# EAGLE board PCB (EAGLE 9.7.0)
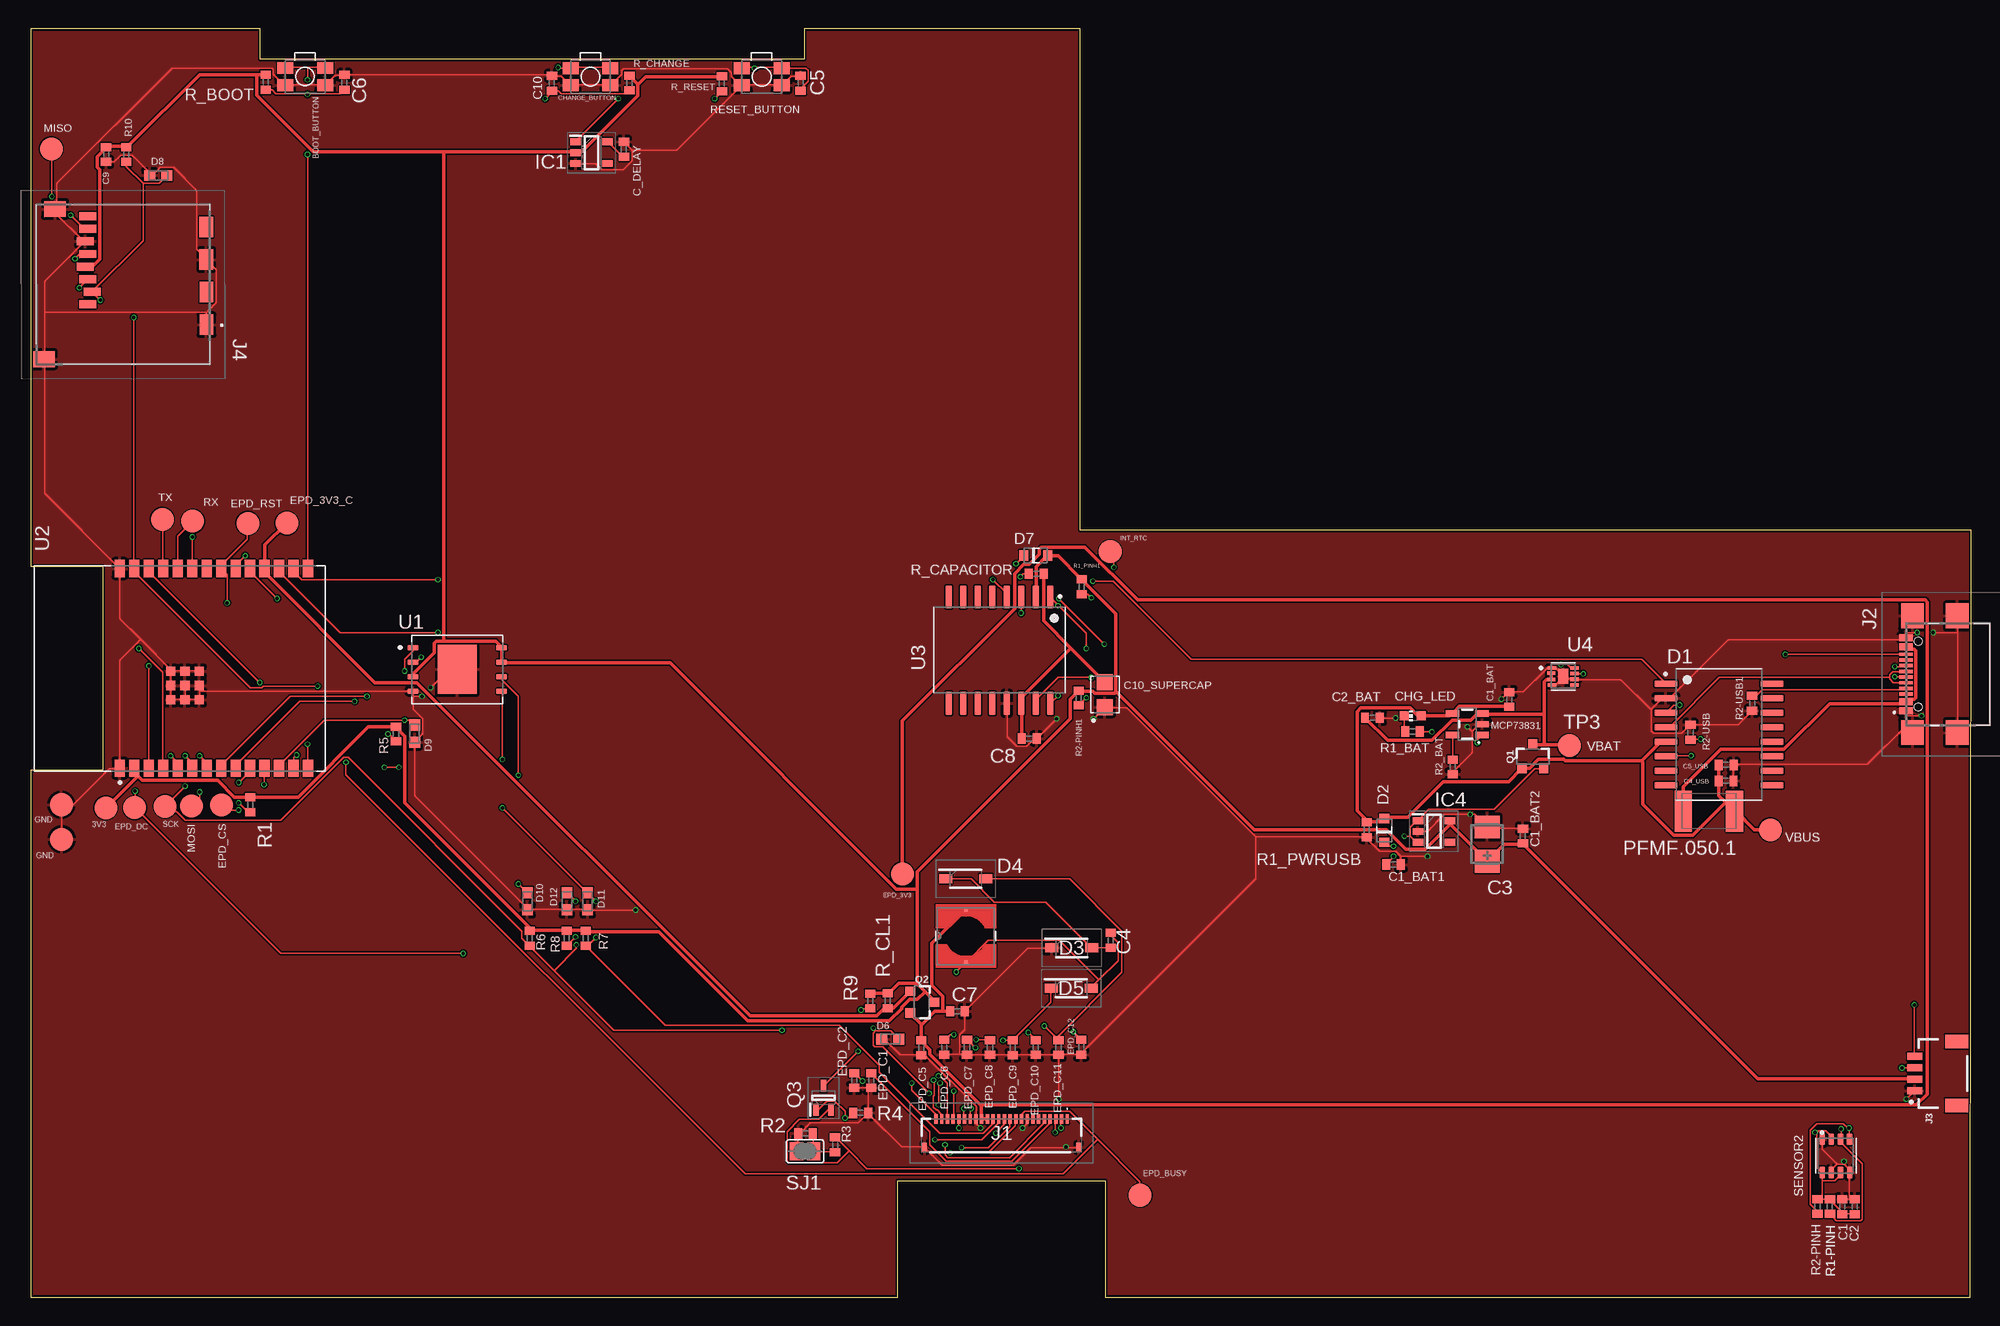
[diagram p0: board, top side]
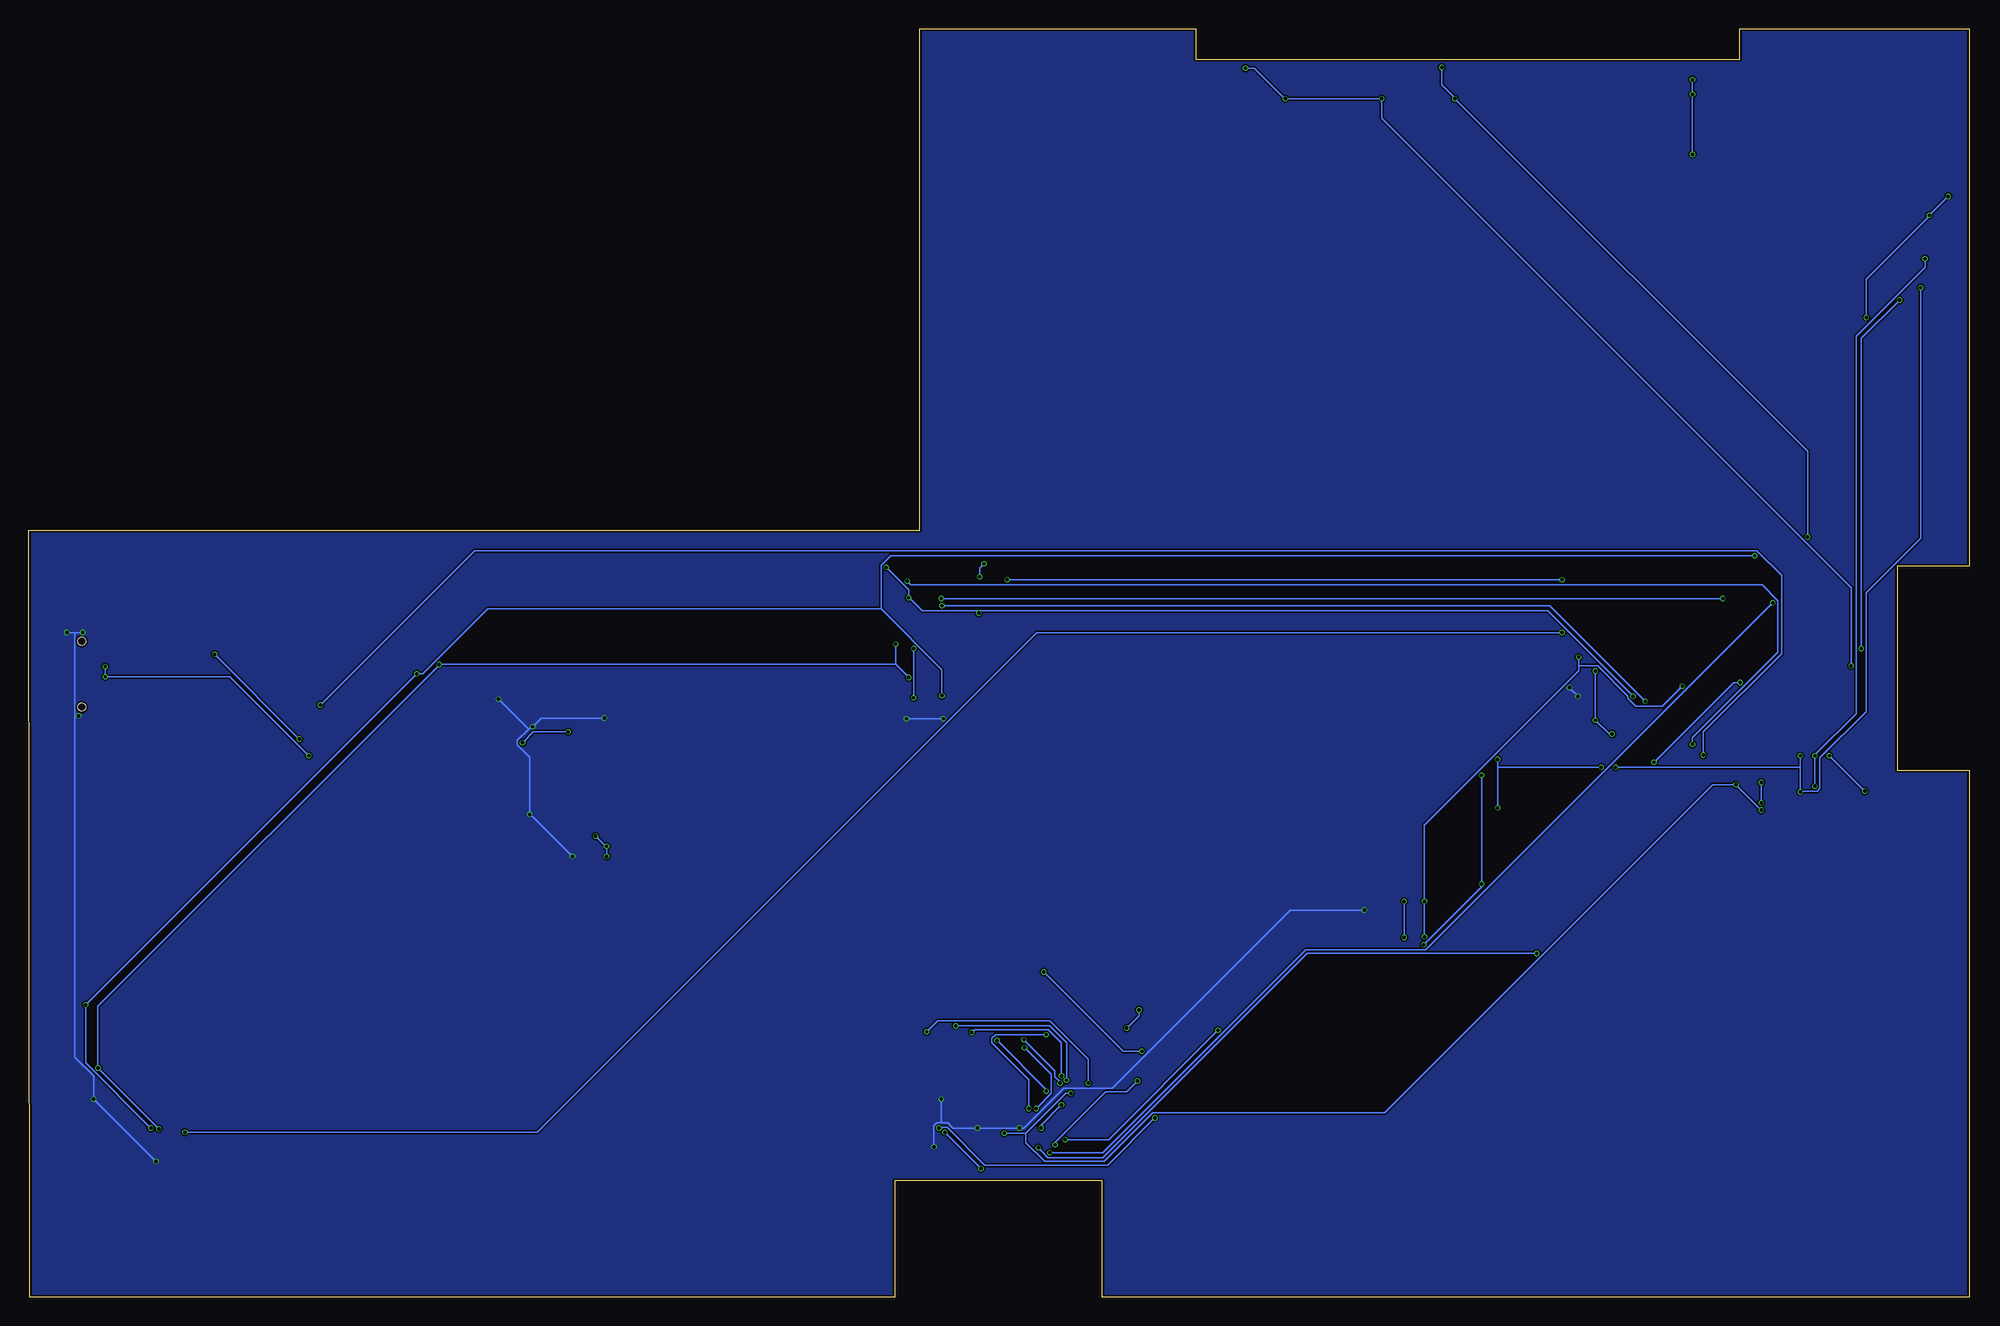
[diagram p1: board, bottom side, seen from below]

Size 170.11 x 111.2 mm. Coordinates in mm from the lower left corner, seen from the top.
Outline: 0,0 76,0 76,10.2 94.2,10.2 94.2,0 170,0 170,0.2 170.11,67.19 170.11,67.2 92,67.2 92,111.2 67.8,111.2 67.8,108.5 20.1,108.5 20.1,111.2 0,111.2 0,64.05 6.31,64.05 6.31,46.18 0,46.18 0,0
Copper layers (1*16): Top 0.035mm / dielectric 1.6mm / Bottom 0.035mm
Design rules "jlcpcb-2layers.dru *": minimum track width 5mil, minimum drill 0.3mm, track to track 5mil, track to pad 5mil, pad to pad 5mil, via to via 5mil, smd to smd 5mil, copper to edge 0.2mm, drill to drill 6mil, minimum pad ring 10mil, minimum via ring 3mil, stop-mask expansion 4mil, vias tented up to drill 0mil, thermal gap 10mil
Net classes: 1 Wires: width 0.15 mm; 2 Power: width 0.3 mm

## Footprints (pad centres in the part's own frame; a part is rotated, then mirrored left to right if it is on the bottom)
MYBUTTON = smd 1.4 x 1.05: 1 1.75,0.75; 2 -1.75,0.75; 3 -1.75,-0.75; 4 1.75,-0.75
ESP32_WROVER_EAGLE-LTSPICE_C0402 = smd 0.7 x 0.9: 1 -0.65,0; 2 0.65,0
EAGLE-LTSPICE_C0402 = smd 0.7 x 0.9: 1 -0.65,0; 2 0.65,0
RCL_CT3528 = smd 2 x 2.2: + -1.5,0; - 1.5,0
CAPCP3225X100N = smd 1.4 x 1.4: 1 -1.1,0; 2 1.1,0
ADAFRUIT_CHIP-LED0603 = smd 0.8 x 0.8: A 0,-0.75; C 0,0.75
SOIC127P1032X265-16N = smd 2.05 x 0.59: 1 -4.655,4.445; 2 -4.655,3.175; 3 -4.655,1.905; 4 -4.655,0.635; 5 -4.655,-0.635; 6 -4.655,-1.905; 7 -4.655,-3.175; 8 -4.655,-4.445; 9 4.655,-4.445; 10 4.655,-3.175; 11 4.655,-1.905; 12 4.655,-0.635; 13 4.655,0.635; 14 4.655,1.905; 15 4.655,3.175; 16 4.655,4.445
ESP32_WROVER_AVX---SD0805S020S1R0_AVX_SD0805S020S1R0_0 = smd 0.8 x 0.9: 1 -1.05,0; 2 1.05,0
SOD3716X135N = smd 1.15 x 0.8: 1 -1.75,0; 2 1.75,0
DIOC1608X36N = smd 0.97 x 0.94: 1 -0.75,0; 2 0.75,0
SOT95P280X120-5N = smd 0.9 x 0.6: 1 -1.4,0.95; 2 -1.4,0; 3 -1.4,-0.95; 4 1.4,-0.95; 5 1.4,0.95
FH34SRJ24S05SH99 = smd 0.3 x 0.8: 1 5.75,1.45; 2 5.25,1.45; 3 4.75,1.45; 4 4.25,1.45; 5 3.75,1.45; 6 3.25,1.45; 7 2.75,1.45; 8 2.25,1.45; 9 1.75,1.45; 10 1.25,1.45; 11 0.75,1.45; 12 0.25,1.45; 13 -0.25,1.45; 14 -0.75,1.45; 15 -1.25,1.45; 16 -1.75,1.45; 17 -2.25,1.45; 18 -2.75,1.45; 19 -3.25,1.45; 20 -3.75,1.45; 21 -4.25,1.45; 22 -4.75,1.45; 23 -5.25,1.45; 24 -5.75,1.45 | smd 0.4 x 0.8: MP1 6.75,-1.05; MP2 -6.75,-1.05
SAMACSYS_PARTS_USB4110GFA = smd 0.3 x 1.15: A1 -3.35,3.678; A4 -2.55,3.678; A5 -1.25,3.678; A6 -0.25,3.678; A7 0.25,3.678; A8 1.25,3.678; A9 2.55,3.678; A12 3.35,3.678; B1 3.05,3.678; B4 2.25,3.678; B5 1.75,3.678; B6 0.75,3.678; B7 -0.75,3.678; B8 -1.75,3.678; B9 -2.25,3.678; B12 -3.05,3.678 | smd 2.18 x 2: MP1 -5.11,-0.827; MP2 5.11,-0.827; MP3 -5.11,3.103; MP4 5.11,3.103 | hole 0.65: -2.89,2.603; 2.89,2.603
JST04_1MM_RA = smd 0.6 x 1.35: 1 -1.5,0; 2 -0.5,0; 3 0.5,0; 4 1.5,0 | smd 1.2 x 2: NC1 2.8,-3.675; NC2 -2.8,-3.675
112ATAARR03ATTEND = smd 1.8 x 1.2: G1 10.6,10.4; G2 4.9,10.4; S1 7.75,10.4; S2 2.05,10.4 | smd 1.4 x 1.9: G3 13.6,-3.85; G4 0.45,-2.85 | smd 0.7 x 1.5: P1 8.8,0; P2 7.7,0.4; P3 6.6,0; P4 5.5,-0.2; P5 4.4,0; P6 3.3,-0.2; P7 2.2,0; P8 1.1,0
IND_4828-WE-TPC_WRE = smd 0.305 x 0.324: 1 -2.286,0 | smd 0.3 x 0.3: 2 2.286,0
ESP32_WROVER_SPARKFUN-IC-POWER_SOT23-5 = smd 0.55 x 1.2: 1 -0.95,-1.3; 2 0,-1.3; 3 0.95,-1.3; 4 0.95,1.3; 5 -0.95,1.3
ESP32C6_VARISTOR_CT/CN1812 = smd 1.5 x 3.6: 1 -2.25,0; 2 2.25,0
ESP32_WROVER_SPARKFUN-DISCRETESEMI_SOT23-3 = smd 0.8 x 0.9: 1 -0.95,-1; 2 0.95,-1; 3 0,1.1
SOT65P210X110-3N = smd 1.05 x 0.5: 1 -1.05,0.65; 2 -1.05,-0.65; 3 1.05,0
ESP32_WROVER_EAGLE-LTSPICE_R0402 = smd 0.7 x 0.9: 1 -0.65,0; 2 0.65,0
ESP32_WROVER_BME680_PSON80P300X300X100-8N = smd 1.016 x 0.5: 1 1.458,1.2; 2 1.458,0.4; 3 1.458,-0.4; 4 1.458,-1.2; 5 -1.458,-1.22; 6 -1.458,-0.4; 7 -1.458,0.4; 8 -1.458,1.2
SJ = smd 1.168 x 1.6: 1 -0.762,0; 2 0.762,0
TP20R = smd 2 x 2: TP 0,0
SON127P600X800X80-9N = smd 0.94 x 0.44: 1 -3.895,1.905; 2 -3.895,0.635; 3 -3.895,-0.635; 4 -3.895,-1.905; 5 3.895,-1.905; 6 3.895,-0.635; 7 3.895,0.635; 8 3.895,1.905 | smd 3.4 x 4.3: 9 0,0
XCVR_ESP32-C6-WROOM-1-N8 = smd 1.5 x 0.9: 1 -8.75,5.26; 2 -8.75,3.99; 3 -8.75,2.72; 4 -8.75,1.45; 5 -8.75,0.18; 6 -8.75,-1.09; 7 -8.75,-2.36; 8 -8.75,-3.63; 9 -8.75,-4.9; 10 -8.75,-6.17; 11 -8.75,-7.44; 12 -8.75,-8.71; 13 -8.75,-9.98; 14 -8.75,-11.25; 15 8.75,-11.25; 16 8.75,-9.98; 17 8.75,-8.71; 18 8.75,-7.44; 19 8.75,-6.17; 20 8.75,-4.9; 21 8.75,-3.63; 22 8.75,-2.36; 23 8.75,-1.09; 24 8.75,0.18; 25 8.75,1.45; 26 8.75,2.72; 27 8.75,3.99; 28 8.75,5.26 | smd 0.8 x 0.8: 29_1 -2.755,0.79; 29_2 -1.505,0.79; 29_3 -0.255,0.79; 29_4 -2.755,-0.46; 29_5 -1.505,-0.46; 29_6 -0.255,-0.46; 29_7 -2.755,-1.71; 29_8 -1.505,-1.71; 29_9 -0.255,-1.71
SON50P200X200X80-9N = smd 0.813 x 0.3: 1 -0.985,0.75; 2 -1.044,0.28; 3 -1.047,-0.283; 4 -0.985,-0.75; 5 0.985,-0.75; 6 0.985,-0.25; 7 0.985,0.25; 8 0.985,0.75 | smd 0.9 x 1.3: 9 0,0

## Placement (x,y rotation side)
BOOT_BUTTON  BUTTON_CUSYOMV1  [MYBUTTON]  24.04,106.99 180 top
C1  100nF  [ESP32_WROVER_EAGLE-LTSPICE_C0402]  158.79,7.93 90 top
C1_BAT  4.7uF  [EAGLE-LTSPICE_C0402]  129.59,52.38 90 top
C1_BAT1  4.7uF  [EAGLE-LTSPICE_C0402]  119.45,37.92 0 top
C1_BAT2  4.7uF  [EAGLE-LTSPICE_C0402]  130.79,40.42 90 top
C2  100nF  [ESP32_WROVER_EAGLE-LTSPICE_C0402]  159.87,7.93 90 top
C2_BAT  4.7uF  [EAGLE-LTSPICE_C0402]  117.6,50.78 0 top
C3  100uF TANT  [RCL_CT3528]  127.65,39.71 90 top
C4  4.7uF/25V  [ESP32_WROVER_EAGLE-LTSPICE_C0402]  94.66,31.27 90 top
C4_USB  100nF  [EAGLE-LTSPICE_C0402]  148.6,45.25 0 top
C5  1uF  [ESP32_WROVER_EAGLE-LTSPICE_C0402]  67.48,106.41 90 top
C5_USB  4.7uF  [EAGLE-LTSPICE_C0402]  148.61,46.65 0 top
C6  100nF  [ESP32_WROVER_EAGLE-LTSPICE_C0402]  27.49,106.48 90 top
C7  10uF  [ESP32_WROVER_EAGLE-LTSPICE_C0402]  81.23,25.06 0 top
C8  100nF  [ESP32_WROVER_EAGLE-LTSPICE_C0402]  87.52,48.96 0 top
C9  100nF  [EAGLE-LTSPICE_C0402]  6.6,100.16 90 top
C10  100nF  [ESP32_WROVER_EAGLE-LTSPICE_C0402]  45.68,106.41 90 top
C10_SUPERCAP  CPH3225A  [CAPCP3225X100N]  94.14,52.81 90 top
C_DELAY  100nF  [ESP32_WROVER_EAGLE-LTSPICE_C0402]  51.99,100.62 90 top
CHANGE_BUTTON  BUTTON_CUSYOMV1  [MYBUTTON]  49.06,106.98 180 top
CHG_LED  [ADAFRUIT_CHIP-LED0603]  121.14,50.95 90 top
D1  USBLC6-2SC6Y  [SOIC127P1032X265-16N]  147.98,49.32 0 top
D2  SD0805S020S1R0  [ESP32_WROVER_AVX---SD0805S020S1R0_AVX_SD0805S020S1R0_0]  118.63,40.91 90 top
D3  MBR0530  [SOD3716X135N]  91.24,30.61 0 top
D4  MBR0530  [SOD3716X135N]  81.96,36.68 0 top
D5  MBR0530  [SOD3716X135N]  91.2,27.08 0 top
D6  PGB1010603MR  [DIOC1608X36N]  75.33,22.61 0 top
D7  ESP32_WROVER_AVX---SD0805S020S1R0_AVX_SD0805S020S1R0_0_0AVX_SD0805S020S1R0_0_0  [ESP32_WROVER_AVX---SD0805S020S1R0_AVX_SD0805S020S1R0_0]  88.08,65.01 0 top
D8  PGB1010603MR  [DIOC1608X36N]  11.16,98.32 0 top
D9  PGB1010603MR  [DIOC1608X36N]  33.65,49.4 90 top
D10  PGB1010603MR  [DIOC1608X36N]  43.53,34.7 90 top
D11  PGB1010603MR  [DIOC1608X36N]  48.81,34.7 90 top
D12  PGB1010603MR  [DIOC1608X36N]  46.99,34.7 90 top
EPD_C1  1uF/50V  [ESP32_WROVER_EAGLE-LTSPICE_C0402]  73.67,18.99 90 top
EPD_C2  1uF/50V  [ESP32_WROVER_EAGLE-LTSPICE_C0402]  72.18,18.99 90 top
EPD_C5  0.1uF/50V  [ESP32_WROVER_EAGLE-LTSPICE_C0402]  78.05,21.86 90 top
EPD_C6  1uF/50V  [ESP32_WROVER_EAGLE-LTSPICE_C0402]  80.08,21.89 90 top
EPD_C7  1uF/50V  [ESP32_WROVER_EAGLE-LTSPICE_C0402]  82.06,21.9 90 top
EPD_C8  1uF/50V  [ESP32_WROVER_EAGLE-LTSPICE_C0402]  84.08,21.88 90 top
EPD_C9  1uF/50V  [ESP32_WROVER_EAGLE-LTSPICE_C0402]  86.07,21.86 90 top
EPD_C10  1uF/50V  [ESP32_WROVER_EAGLE-LTSPICE_C0402]  88.09,21.88 90 top
EPD_C11  1uF/50V  [ESP32_WROVER_EAGLE-LTSPICE_C0402]  90.09,21.88 90 top
EPD_C12  1uF/50V  [ESP32_WROVER_EAGLE-LTSPICE_C0402]  92.08,21.91 90 top
IC1  BD5229G-TR  [SOT95P280X120-5N]  49.15,100.32 0 top
IC4  XC6220A331MR-G  [SOT95P280X120-5N]  122.99,40.82 0 top
J1  FH34SRJ-24S-0.5SH_99_  [FH34SRJ24S05SH99]  85.1,14.17 0 top
J2  SAMACSYS_PARTS_USB4110-GF-A  [SAMACSYS_PARTS_USB4110GFA]  168.05,54.6 90 top
J3  QWIIC_RIGHT_ANGLE  [JST04_1MM_RA]  165.13,19.6 90 top
J4  112A-TAAR-R03_ATTEND  [112ATAARR03ATTEND]  4.98,95.83 270.1 top
L1  68uH  [IND_4828-WE-TPC_WRE]  81.97,31.65 90 top
MCP73831  ESP32_WROVER_SPARKFUN-IC-POWER_MCP73831  [ESP32_WROVER_SPARKFUN-IC-POWER_SOT23-5]  125.91,50.22 90 top
PFMF.050.1  ESP32C6_VARISTORCN1812  [ESP32C6_VARISTOR_CT/CN1812]  147.09,42.6 0 top
Q1  20V/4.2A/52mΩ/1.4W  [ESP32_WROVER_SPARKFUN-DISCRETESEMI_SOT23-3]  131.66,47.36 0 top
Q2  20V/4.2A/52mΩ/1.4W  [ESP32_WROVER_SPARKFUN-DISCRETESEMI_SOT23-3]  78.08,25.86 270 top
Q3  SI1308EDL-T1-GE3  [SOT65P210X110-3N]  69.48,17.47 90 top
R1  10k  [ESP32_WROVER_EAGLE-LTSPICE_R0402]  19.23,43.16 90 top
R1-PINH  10K  [ESP32_WROVER_EAGLE-LTSPICE_R0402]  157.7,7.95 90 top
R1_BAT  200  [ESP32_WROVER_EAGLE-LTSPICE_R0402]  121.11,49.58 0 top
R1_PINH1  10K  [ESP32_WROVER_EAGLE-LTSPICE_R0402]  92.12,62.27 90 top
R1_PWRUSB  100K  [ESP32_WROVER_EAGLE-LTSPICE_R0402]  117.11,40.97 90 top
R2  2.2  [ESP32_WROVER_EAGLE-LTSPICE_R0402]  67.9,14.35 0 top
R2-PINH  10K  [ESP32_WROVER_EAGLE-LTSPICE_R0402]  156.61,7.95 90 top
R2-PINH1  10K  [ESP32_WROVER_EAGLE-LTSPICE_R0402]  91.85,52.52 90 top
R2-USB  5k1  [ESP32_WROVER_EAGLE-LTSPICE_R0402]  145.48,49.51 90 top
R2-USB1  5k1  [ESP32_WROVER_EAGLE-LTSPICE_R0402]  150.88,52.05 90 top
R2_BAT  2K  [ESP32_WROVER_EAGLE-LTSPICE_R0402]  124.63,46.47 90 top
R3  0.47  [ESP32_WROVER_EAGLE-LTSPICE_R0402]  70.5,13.35 90 top
R4  10K  [ESP32_WROVER_EAGLE-LTSPICE_R0402]  72.74,16.15 180 top
R5  10K  [ESP32_WROVER_EAGLE-LTSPICE_R0402]  32.01,49.36 90 top
R6  10K  [ESP32_WROVER_EAGLE-LTSPICE_R0402]  43.73,31.46 90 top
R7  10K  [ESP32_WROVER_EAGLE-LTSPICE_R0402]  48.65,31.46 90 top
R8  10K  [ESP32_WROVER_EAGLE-LTSPICE_R0402]  46.97,31.46 90 top
R9  10K  [ESP32_WROVER_EAGLE-LTSPICE_R0402]  73.59,25.96 90 top
R10  10K  [ESP32_WROVER_EAGLE-LTSPICE_R0402]  8.37,100.16 90 top
R_BOOT  10K  [ESP32_WROVER_EAGLE-LTSPICE_R0402]  20.59,106.5 90 top
R_CAPACITOR  15  [ESP32_WROVER_EAGLE-LTSPICE_R0402]  88.14,63.4 0 top
R_CHANGE  10K  [ESP32_WROVER_EAGLE-LTSPICE_R0402]  52.48,106.42 90 top
R_CL1  10K  [ESP32_WROVER_EAGLE-LTSPICE_R0402]  75.11,25.98 90 top
R_RESET  10K  [ESP32_WROVER_EAGLE-LTSPICE_R0402]  60.58,106.37 90 top
RESET_BUTTON  BUTTON_CUSYOMV1  [MYBUTTON]  64.07,106.98 180 top
SENSOR2  BME688  [ESP32_WROVER_BME680_PSON80P300X300X100-8N]  158.22,12.38 90 top
SJ1  [SJ]  67.87,12.79 0 top
TP1  TPTP20R  [TP20R]  11.54,68.18 0 top
TP2  TPTP20R  [TP20R]  14.18,68.02 0 top
TP3  TPTP20R  [TP20R]  134.87,48.34 0 top
TP4  TPTP20R  [TP20R]  2.68,43.16 0 top
TP5  TPTP20R  [TP20R]  2.7,40.13 0 top
TP6  TPTP20R  [TP20R]  1.8,100.66 0 top
TP7  TPTP20R  [TP20R]  14.09,43.06 0 top
TP8  TPTP20R  [TP20R]  11.77,43.02 0 top
TP9  TPTP20R  [TP20R]  97.23,8.93 0 top
TP10  TPTP20R  [TP20R]  16.71,43.15 0 top
TP11  TPTP20R  [TP20R]  9.1,42.9 0 top
TP12  TPTP20R  [TP20R]  19.02,67.82 0 top
TP13  TPTP20R  [TP20R]  22.45,67.85 0 top
TP14  TPTP20R  [TP20R]  152.49,40.95 0 top
TP15  TPTP20R  [TP20R]  94.62,65.34 90 top
TP16  TPTP20R  [TP20R]  6.59,42.88 0 top
TP17  TPTP20R  [TP20R]  76.39,37.11 0 top
U1  W25Q512JVEIQ  [SON127P600X800X80-9N]  37.38,55.02 0 top
U2  ESP32-C6-WROOM-1-N8  [XCVR_ESP32-C6-WROOM-1-N8]  13.06,55.12 90 top
U3  DS3231SN#  [SOIC127P1032X265-16N]  84.92,56.71 270 top
U4  MAX17048G+T10  [SON50P200X200X80-9N]  134.32,54.41 0 top

## Library data of the parts
BOOT_BUTTON CHANGE_BUTTON CHG_LED PFMF.050.1 RESET_BUTTON SJ1 TP1-TP17 = DeskAssistant v19 v1
C1 C1_BAT C1_BAT1 C1_BAT2 C2 C2_BAT C4 C4_USB C5 C5_USB C6-C10 C_DELAY EPD_C1 EPD_C2 EPD_C5-EPD_C12 = DeskAssistant v19 v1; SPICEMODEL: NONE; SPICEPREFIX: C
C3 = DeskAssistant v19 v1; SPICEPREFIX: C
C10_SUPERCAP = DeskAssistant v19 v1; AVAILABILITY: Not in stock; CHECK_PRICES: https://www.snapeda.com/parts/CPH3225A/Seiko+Instruments/view-part/?ref=eda; DESCRIPTION: 11 mF (EDLC) Supercapacitor 3.3 V 1210 (3225 Metric) - -; MF: Seiko Instruments; MP: CPH3225A; PACKAGE: 1210 Seiko; PRICE: None; PURCHASE-URL: https://www.snapeda.com/api/url_track_click_mouser/?unipart_id=562593&manufacturer=Seiko Instruments&part_name=CPH3225A&search_term=None; SNAPEDA_LINK: https://www.snapeda.com/parts/CPH3225A/Seiko+Instruments/view-part/?ref=snap
D1 = DeskAssistant v19 v1; AVAILABILITY: In Stock; CHECK_PRICES: https://www.snapeda.com/parts/USBLC6-2SC6Y/STMicroelectronics/view-part/?ref=eda; DESCRIPTION: 17V Clamp 5A (8/20µs) Ipp Tvs Diode Surface Mount SOT-23-6; MF: STMicroelectronics; MP: USBLC6-2SC6Y; PACKAGE: SOT-23-6 STMicroelectronics; PRICE: None; SNAPEDA_LINK: https://www.snapeda.com/parts/USBLC6-2SC6Y/STMicroelectronics/view-part/?ref=snap
D2 = DeskAssistant v19 v1; CENTROID_NOT_SPECIFIED: No; DATASHEET: http://datasheets.avx.com/schottky.pdf; DIGIKEY_DESCRIPTION: DIODE SCHOTTKY 20V 1A 0805; DIGIKEY_PART_NUMBER: 478-7800-1-ND; LEAD_FREE: yes; MF: AVX; MOUSER_PART_NUMBER: 581-SD0805S020S1R0; PACKAGE: 0805 (2012 metric); PREFIX: D; ROHS: yes; TEMPERATURE_RANGE_HIGH: +125°C; TEMPERATURE_RANGE_LOW: -55°C; VALUE_DISPLAY: SD0805S020S1R0
D3-D5 = DeskAssistant v19 v1; AVAILABILITY: In Stock; CHECK_PRICES: https://www.snapeda.com/parts/MBR0530/Onsemi/view-part/?ref=eda; DESCRIPTION: Diode Schottky 30 V 500mA Surface Mount SOD-123; MF: ON Semiconductor; MP: MBR0530; PACKAGE: SOD-123-2 ON Semiconductor; PRICE: None; PURCHASE-URL: https://www.snapeda.com/api/url_track_click_mouser/?unipart_id=179458&manufacturer=ON Semiconductor&part_name=MBR0530&search_term=None; SNAPEDA_LINK: https://www.snapeda.com/parts/MBR0530/Onsemi/view-part/?ref=snap
D6 D8-D12 = DeskAssistant v19 v1; AVAILABILITY: In Stock; CHECK_PRICES: https://www.snapeda.com/parts/PGB1010603MR/Littelfuse/view-part/?ref=eda; DESCRIPTION: 150V (Typ) Clamp - Ipp Tvs Diode Surface Mount 0603 (1608 Metric); MF: Littelfuse Inc.; MP: PGB1010603MR; PACKAGE: 0603 Littelfuse Inc.; PRICE: None; PURCHASE-URL: https://www.snapeda.com/api/url_track_click_mouser/?unipart_id=5659453&manufacturer=Littelfuse Inc.&part_name=PGB1010603MR&search_term=None; SNAPEDA_LINK: https://www.snapeda.com/parts/PGB1010603MR/Littelfuse/view-part/?ref=snap
D7 = DeskAssistant v19 v1; CENTROID_NOT_SPECIFIED: No; DATASHEET: http://datasheets.avx.com/schottky.pdf; DIGIKEY_DESCRIPTION: DIODE SCHOTTKY 20V 1A 0805; DIGIKEY_PART_NUMBER: 478-7800-1-ND; LEAD_FREE: yes; MF: AVX; MOUSER_PART_NUMBER: 581-SD0805S020S1R0; PACKAGE: 0805 (2012 metric); PREFIX: D; ROHS: yes; TEMPERATURE_RANGE_HIGH: +125°C; TEMPERATURE_RANGE_LOW: -55°C
IC1 = DeskAssistant v19 v1; DESCRIPTION: Voltage Detector with Adjustable Delay Time: CMOS processes are utilized to develop high precision, low current consumption CMOS reset ICs that allow arbitrary setting of the delay time. The extensive lineup includes both Nch Open Drain and CMOS output types in a wide range of detection voltages (from 2.3V to 6.0V, in 0.1V steps), enabling selection of the ideal solution based on customer requirements. In addition, the entire series is of course both lead-free and RoHS-compliant.; HEIGHT: 1.25mm; MANUFACTURER_NAME: ROHM Semiconductor; MANUFACTURER_PART_NUMBER: BD5229G-TR; MOUSER_PART_NUMBER: 755-BD5229G-TR; MOUSER_PRICE-STOCK: https://www.mouser.co.uk/ProductDetail/ROHM-Semiconductor/BD5229G-TR?qs=4kLU8WoGk0vvnhrrYwdszw%3D%3D
IC4 = DeskAssistant v19 v1; DESCRIPTION: LDO Voltage Regulators; HEIGHT: 1.2mm; MANUFACTURER_NAME: Torex; MANUFACTURER_PART_NUMBER: XC6220A331MR-G; MOUSER_PART_NUMBER: 865-XC6220A331MR-G; MOUSER_PRICE-STOCK: https://www.mouser.co.uk/ProductDetail/Torex-Semiconductor/XC6220A331MR-G?qs=AsjdqWjXhJ8ZSWznL1J0gg%3D%3D
J1 = DeskAssistant v19 v1; DESCRIPTION: 24 Position FFC, FPC Connector Contacts, Top and Bottom 0.020" (0.50mm) Surface Mount, Right Angle; HEIGHT: 1.1mm; MANUFACTURER_NAME: Hirose; MANUFACTURER_PART_NUMBER: FH34SRJ-24S-0.5SH(99); MOUSER_PART_NUMBER: 798-FH34SRJ24S05SH99; MOUSER_PRICE-STOCK: https://www.mouser.co.uk/ProductDetail/Hirose-Connector/FH34SRJ-24S-0.5SH99?qs=vcbW%252B4%252BSTIpKBl5ap9J8Fw%3D%3D
J2 = DeskAssistant v19 v1; DESCRIPTION: CONN USB 2.0 TYPE-C R/A SMT; HEIGHT: 3.26mm; MANUFACTURER_NAME: GCT (GLOBAL CONNECTOR TECHNOLOGY); MANUFACTURER_PART_NUMBER: USB4110-GF-A; MOUSER_PART_NUMBER: 640-USB4110-GF-A; MOUSER_PRICE-STOCK: https://www.mouser.co.uk/ProductDetail/GCT/USB4110-GF-A?qs=KUoIvG%2F9IlYiZvIXQjyJeA%3D%3D
J3 = DeskAssistant v19 v1; PROD_ID: CONN-13694
J4 = DeskAssistant v19 v1; DESCRIPTION: Micro SD Card Socket, Push-Push Type, Top Mount, SMT, H=1.83mm, 10u; HEIGHT: 1.9mm; MANUFACTURER_NAME: ATTEND; MANUFACTURER_PART_NUMBER: 112A-TAAR-R03 ATTEND
L1 = DeskAssistant v19 v1; COPYRIGHT: Copyright (C) 2024 Ultra Librarian. All rights reserved.; MANUFACTURER_PART_NUMBER: 744043680; MFR_NAME: Wurth Electronics
MCP73831 = DeskAssistant v19 v1; PROD_ID: IC-09995
Q1 = DeskAssistant v19 v1; PROD_ID: TRAN-14388
Q2 = DeskAssistant v19 v1; ATRIBUT: DMG2305UX-7; PROD_ID: TRAN-14388
Q3 = DeskAssistant v19 v1; AVAILABILITY: In Stock; CHECK_PRICES: https://www.snapeda.com/parts/SI1308EDL-T1-GE3/Vishay+Siliconix/view-part/?ref=eda; DESCRIPTION: Si1308EDL-T1-GE3 N-channel MOSFET Transistor, 1.5 A, 30 V, 3-Pin SC-70 | Siliconix / Vishay SI1308EDL-T1-GE3; MF: Vishay Siliconix; MP: SI1308EDL-T1-GE3; PACKAGE: SOT-323 Vishay Semiconductor; PRICE: None; PURCHASE-URL: https://www.snapeda.com/api/url_track_click_mouser/?unipart_id=274603&manufacturer=Vishay Siliconix&part_name=SI1308EDL-T1-GE3&search_term=None; SNAPEDA_LINK: https://www.snapeda.com/parts/SI1308EDL-T1-GE3/Vishay+Siliconix/view-part/?ref=snap
R1 R1-PINH R1_BAT R1_PINH1 R1_PWRUSB R2 R2-PINH R2-PINH1 R2-USB R2-USB1 R2_BAT R3-R10 R_BOOT R_CAPACITOR R_CHANGE R_CL1 R_RESET = DeskAssistant v19 v1; SPICEMODEL: NONE; SPICEPREFIX: R
SENSOR2 = DeskAssistant v19 v1; AVAILABILITY: Unavailable; DESCRIPTION: Integrated Environmental Unit; MF: Bosch Sensortec; MP: BME680; PACKAGE: LGA-8 Bosch Tools; PRICE: None
U1 = DeskAssistant v19 v1; AVAILABILITY: In Stock; CHECK_PRICES: https://www.snapeda.com/parts/W25Q512JVEIQ/Winbond+Electronics/view-part/?ref=eda; DESCRIPTION: FLASH - NOR Memory IC 512Mb (64M x 8) SPI - Quad I/O 133 MHz 8-WSON (8x6); MF: Winbond Electronics; MP: W25Q512JVEIQ; PACKAGE: Package; PRICE: None; SNAPEDA_LINK: https://www.snapeda.com/parts/W25Q512JVEIQ/Winbond+Electronics/view-part/?ref=snap
U2 = DeskAssistant v19 v1; AVAILABILITY: In Stock; CHECK_PRICES: https://www.snapeda.com/parts/ESP32-C6-WROOM-1-N8/Espressif+Systems/view-part/?ref=eda; DESCRIPTION: Multiprotocol Modules ESP32-C6 module, Wi-Fi 6 in 2.4 GHz band, Bluetooth 5, Zigbee 3.0 and Thread. ESP34-WROOM Compatible - ENGINEERING SAMPLE; MF: Espressif Systems; MP: ESP32-C6-WROOM-1-N8; PACKAGE: None; PRICE: None; SNAPEDA_LINK: https://www.snapeda.com/parts/ESP32-C6-WROOM-1-N8/Espressif+Systems/view-part/?ref=snap
U3 = DeskAssistant v19 v1; AVAILABILITY: In Stock; CHECK_PRICES: https://www.snapeda.com/parts/DS3231SN%23/Analog+Devices/view-part/?ref=eda; DESCRIPTION: Extremely Accurate I²C-Integrated RTC/TCXO/Crystal; MF: Analog Devices; MP: DS3231SN#; PACKAGE: SOIC-16 Maxim; PRICE: None; PURCHASE-URL: https://www.snapeda.com/api/url_track_click_mouser/?unipart_id=99048&manufacturer=Analog Devices&part_name=DS3231SN#&search_term=None; SNAPEDA_LINK: https://www.snapeda.com/parts/DS3231SN%23/Analog+Devices/view-part/?ref=snap
U4 = DeskAssistant v19 v1; AVAILABILITY: In Stock; CHECK_PRICES: https://www.snapeda.com/parts/MAX17048G+T10/Analog+Devices/view-part/?ref=eda; DESCRIPTION: 3µA 1-Cell/2-Cell Fuel Gauge with ModelGauge; MF: Analog Devices; MP: MAX17048G+T10; PACKAGE: TDFN-8 Maxim; PRICE: None; PURCHASE-URL: https://www.snapeda.com/api/url_track_click_mouser/?unipart_id=329239&manufacturer=Analog Devices&part_name=MAX17048G+T10&search_term=None; SNAPEDA_LINK: https://www.snapeda.com/parts/MAX17048G+T10/Analog+Devices/view-part/?ref=snap

## Nets
3V3 [Power]: C1_BAT2.1 C3.+ C9.2 D7.2 IC1.2 IC4.5 J3.2 J4.P4 Q2.3 R1.2 R1_PINH1.2 R2-PINH1.2 R5.2 R6.2 R7.2 R8.2 R9.2 R10.2 R_BOOT.2 R_CHANGE.2 R_CL1.2 R_RESET.2 TP16.TP U1.3 U1.7 U1.8 U2.2 U3.2
32KHZ [Wires]: R2-PINH1.1 U2.9 U3.1
DN [Wires]: D1.4 J2.A7 J2.B7
DP [Wires]: D1.6 J2.A6 J2.B6
EPD_3V3 [Power]: C7.1 EPD_C5.2 J1.15 J1.16 L1.2 Q2.2 TP17.TP
EPD_3V3_C [Power]: Q2.1 R_CL1.1 TP13.TP U2.18
EPD_BUSY [Wires]: J1.9 TP9.TP U2.26
EPD_CS [Wires]: D6.2 J1.12 R9.1 TP10.TP U2.11
EPD_DC [Wires]: J1.11 TP11.TP U2.5
EPD_RST [Wires]: J1.10 TP12.TP U2.21
FLASH_CS [Wires]: D9.2 R5.1 U1.1 U2.12
GDR [Wires]: J1.2 Q3.1 R4.2
GND [Wires]: BOOT_BUTTON.1 BOOT_BUTTON.2 C1.2 C1_BAT1.2 C1_BAT2.2 C1_BAT.2 C2.2 C2_BAT.2 C3.- C4_USB.2 C5.2 C5_USB.2 C6.2 C7.2 C8.2 C9.1 C10.2 C10_SUPERCAP.1 C_DELAY.2 CHANGE_BUTTON.1 CHANGE_BUTTON.2 D1.2 D3.1 D6.1 D8.1 D9.1 D10.1 D11.1 D12.1 EPD_C1.1 EPD_C2.1 EPD_C5.1 EPD_C6.1 EPD_C7.1 EPD_C8.1 EPD_C9.1 EPD_C10.1 EPD_C11.1 EPD_C12.1 IC1.3 IC4.2 J1.8 J1.17 J1.MP1 J1.MP2 J2.A1 J2.A12 J2.B1 J2.B12 J2.MP1 J2.MP2 J2.MP3 J2.MP4 J3.1 J4.G1 J4.G2 J4.G3 J4.G4 J4.P6 MCP73831.2 R1_PWRUSB.1 R2-USB1.1 R2-USB.2 R2.1 R2_BAT.1 R4.1 RESET_BUTTON.1 RESET_BUTTON.2 SENSOR2.1 SENSOR2.5 SENSOR2.7 SJ1.1 TP4.TP TP5.TP U1.4 U1.9 U2.1 U2.28 U2.29_1 U2.29_2 U2.29_3 U2.29_4 U2.29_5 U2.29_6 U2.29_7 U2.29_8 U2.29_9 U3.13 U4.1 U4.4 U4.6 U4.9
GPIO8 [Wires]: R1.1 U2.10
I2C_PW [Wires]: C1.1 C2.1 R1-PINH.2 R2-PINH.2 SENSOR2.2 SENSOR2.6 SENSOR2.8 U2.17
INT_RTC [Wires]: R1_PINH1.1 TP15.TP U2.8 U3.3
IO/BOOT [Wires]: BOOT_BUTTON.3 BOOT_BUTTON.4 C6.1 R_BOOT.1 U2.15
IO/CHANGE [Wires]: C10.1 CHANGE_BUTTON.3 CHANGE_BUTTON.4 R_CHANGE.1 U2.23
MISO [Wires]: D12.2 J4.P7 R8.1 TP6.TP U1.2 U2.27
MOSI [Wires]: D11.2 J1.14 J4.P3 R7.1 TP7.TP U1.5 U2.7
N$1 [Wires]: C_DELAY.1 IC1.5
N$2 [Wires]: J2.A5 R2-USB1.2
N$3 [Wires]: MCP73831.1 R1_BAT.2
N$4 [Wires]: C1_BAT1.1 D2.1 IC4.1 IC4.3 Q1.2
N$5 [Wires]: CHG_LED.C R1_BAT.1
N$6 [Wires]: MCP73831.5 R2_BAT.2
N$8 [Wires]: EPD_C12.2 J1.24
N$9 [Wires]: C4.1 D3.2 D4.1
N$10 [Wires]: D7.1 R_CAPACITOR.1
N$11 [Wires]: J2.B5 R2-USB.1
N$12 [Wires]: EPD_C6.2 J1.18
N$13 [Wires]: EPD_C8.2 J1.20
N$14 [Wires]: EPD_C7.2 J1.19
N$17 [Wires]: EPD_C10.2 J1.22
N$26 [Wires]: EPD_C2.2 J1.5
N$27 [Wires]: EPD_C1.2 J1.4
PREVGH [Wires]: D5.1 EPD_C9.2 J1.21
PREVGL [Wires]: D4.2 EPD_C11.2 J1.23
RESE [Wires]: J1.3 Q3.2 R3.2
RESE' [Wires]: R2.2 R3.1 SJ1.2
RESET [Wires]: C5.1 IC1.1 R_RESET.1 RESET_BUTTON.3 RESET_BUTTON.4 U2.3
RTC_RST [Wires]: U2.16 U3.4
RX [Wires]: TP2.TP U2.24
SCK [Wires]: D10.2 J1.13 J4.P5 R6.1 TP8.TP U1.6 U2.6
SCL [Wires]: J3.4 R2-PINH.1 SENSOR2.4 U2.20 U3.16 U4.7
SDA [Wires]: J3.3 R1-PINH.1 SENSOR2.3 U2.19 U3.15 U4.8
SRC [Wires]: C4.2 D5.2 L1.1 Q3.3
SS_SD [Wires]: D8.2 J4.P2 R10.1 U2.4
TX [Wires]: TP1.TP U2.25
USB_D+ [Wires]: D1.1 U2.14
USB_D- [Wires]: D1.3 U2.13
VBAT [Power]: C2_BAT.1 MCP73831.3 Q1.3 TP3.TP U4.2 U4.3
VBUS [Power]: C1_BAT.1 C4_USB.1 C5_USB.1 CHG_LED.A D1.5 D2.2 MCP73831.4 PFMF.050.1.2 Q1.1 R1_PWRUSB.2 TP14.TP
VRTC [Power]: C8.1 C10_SUPERCAP.2 R_CAPACITOR.2 U3.14
VUSB [Power]: J2.A4 J2.A9 J2.B4 J2.B9 PFMF.050.1.1

## Tracks (layer width: path | path; a pad name or v marks a point on that pad's centre or on a via)
3V3
  Top 0.3: 53.21,106.32 53.21,105.31 48.26,100.35 47.75,100.35 IC1.2 47.62,100.42 36.2,100.42 | 53.21,106.32 52.51,107.02 R_CHANGE.2 | R_RESET.2 60.58,106.96 53.91,106.96 53.34,106.39 53.21,106.32 | 19.81,107.15 14.8,107.15 8.51,100.86 R10.2 8.32,100.86 6.6,100.86 C9.2 6.54,100.67 5.84,99.97 5.84,99.02 6.03,98.83 6.03,90.96 5.46,90.38 4.83,90.38 J4.P4 | 19.81,107.15 20.57,107.15 R_BOOT.2 | 36.2,100.42 24.77,100.42 19.81,105.37 19.81,107.15 | 124.4,41.49 124.4,41.74 IC4.5 | 124.4,41.49 127.64,38.25 C3.+ 127.76,38.31 129.16,39.71 130.75,39.71 C1_BAT2.1 130.87,39.65 151.38,19.14 165.1,19.14 J3.2 | TP16.TP 6.6,42.89 9.34,45.62 U2.2 9.08,46.31 9.08,46 9.78,45.3 16.38,45.3 17.84,43.84 19.18,43.84 R1.2 19.37,43.84 23.43,43.84 29.59,50 32,50 R5.2 32.07,49.87 32.77,49.17 32.77,43.33 43.69,32.41 43.69,32.28 R6.2 43.75,32.16 46.93,32.16 R8.2 47.12,32.16 48.64,32.16 R7.2 48.77,32.03 55.05,32.03 62.87,24.22 75.25,24.22 76.33,25.3 76.33,25.42 77.03,26.12 77.72,26.12 78.39,26.79 | 36.2,57.49 40.77,57.49 41.27,56.98 U1.8 41.27,56.79 41.27,55.71 U1.7 41.4,55.59 56.07,55.59 75.88,35.77 77.72,35.77 | 36.2,57.49 35.56,57.49 35.37,57.3 35.37,56.48 33.53,54.63 33.53,54.44 U1.3 | R9.2 73.6,26.63 75.06,26.63 R_CL1.2 75.25,26.69 76.07,27.52 77.66,27.52 | 77.66,27.52 78.39,26.79 | 78.39,26.79 79.12,26.06 79.12,25.87 Q2.3 | 95.12,53.05 95,52.92 93.28,52.92 93.09,53.11 91.89,53.11 R2-PINH1.2 91.76,53.05 91.12,52.41 91.12,50.7 77.72,37.3 77.72,35.77 | 95.12,53.05 95.12,59.91 92.14,62.89 R1_PINH1.2 92.01,63.02 90.04,64.98 89.15,64.98 D7.2 89.03,64.92 88.14,64.03 88.14,61.36 U3.2
  Top 0.3: 77.72,35.77 77.72,27.65 77.66,27.52 | 124.4,41.49 124.33,41.36 122.24,39.27 120.52,39.27 118.81,40.98 107.25,40.98 95.25,52.98 95.12,53.05 | 36.2,57.49 36.2,100.42
32KHZ  (via drill 0.3)
  Top 0.15: v92.52,52.54 91.89,51.9 R2-PINH1.1 | v92.52,56.86 92.52,58.19 90.08,60.64 | 90.08,60.64 89.41,61.3 U3.1 | v28.38,52.22 23.56,52.22 17.97,46.63 U2.9 | v90.04,60.6 90.08,60.64
  Bottom 0.15: v92.52,56.86 v92.52,52.54 | v28.38,52.22 36.77,60.6 v90.04,60.6
DN
  Top 0.15: 162.94,54.32 162.94,54.57 163.19,54.82 164.34,54.82 J2.A7 | 162.94,54.32 162.94,54.19 163.26,53.87 164.34,53.87 J2.B7 | 162.94,54.32 148.02,54.32 143.7,50 143.38,50 D1.4
DP  (via drill 0.3)
  Top 0.15: v163.39,54.38 164.34,54.38 J2.A6 | v163.39,55.27 164.27,55.27 164.34,55.33 J2.B6 | v145.54,47.46 143.38,47.46 D1.6
  Bottom 0.15: v163.39,55.27 v163.39,54.38 152.46,54.38 v145.54,47.46
EPD_3V3
  Top 0.3: J1.15 83.82,15.64 83.38,15.64 J1.16 83.31,15.77 83.31,16.79 | 78.04,23.9 78.04,22.57 EPD_C5.2 78.11,22.38 78.8,21.68 78.8,21.3 83.31,16.79 | 78.04,23.9 77.09,24.85 Q2.2 | 79.95,25.04 79.25,25.04 78.17,23.96 78.04,23.9 | 79.95,25.04 80.52,25.04 C7.1 | TP17.TP 76.39,37.17 76.39,50.51 86.23,60.35 86.23,63.4 87.06,64.22 87.5,64.22 88.39,65.11 88.39,65.56 88.58,65.75 92.39,65.75 97.03,61.11 166.05,61.11 166.24,60.92 166.24,17.8 165.29,16.85 83.44,16.85 83.31,16.79 | 79.95,25.04 79.95,26.38 78.99,27.33 78.99,31.01 81.92,33.93 L1.2
EPD_3V3_C
  Top 0.3: Q2.1 77.03,26.76 75.63,25.36 75.12,25.36 R_CL1.1 74.99,25.23 74.74,25.23 74.17,24.66 63.06,24.66 33.85,53.87 30.16,53.87 20.51,63.52 20.51,63.71 U2.18 20.51,63.91 20.51,65.94 22.42,67.84 TP13.TP
EPD_BUSY  (via drill 0.3)
  Top 0.15: 93.5,13.83 97.22,10.12 97.22,8.98 TP9.TP | 93.5,13.83 91.06,16.28 87.12,16.28 86.87,16.03 86.87,15.64 J1.9 | v20.07,53.87 10.35,63.59 10.35,63.84 U2.26 | v27.62,46.89 27.62,45.81 62.61,10.82 90.49,10.82 93.5,13.83
  Bottom 0.15: v20.07,53.87 20.64,53.87 v27.62,46.89
EPD_CS  (via drill 0.3)
  Top 0.15: v20.45,44.92 20.45,46.31 U2.11 | v18.22,42.7 17.21,42.7 16.76,43.14 TP10.TP | v84.58,14.38 85.34,15.14 85.34,15.58 J1.12 | v78.74,17.87 74.68,21.93 73.98,21.93 73.85,22.06 73.85,23.14 74.04,23.33 | 74.04,23.33 75.37,23.33 76.07,22.63 D6.2 | v72.77,25.17 72.9,25.3 73.53,25.3 R9.1 | v73.85,23.58 74.04,23.39 74.04,23.33
  Bottom 0.15: v18.22,42.7 v20.45,44.92 22.48,44.92 51.24,16.15 71.56,16.15 75.82,11.9 81.03,11.9 82.68,13.55 82.68,14.38 | 82.68,14.38 v84.58,14.38 | 82.68,14.38 79.18,17.87 v78.74,17.87 | v72.77,25.17 72.77,24.66 v73.85,23.58
EPD_DC  (via drill 0.3)
  Top 0.15: v81.6,13.1 83.95,13.1 85.79,14.95 85.79,15.58 J1.11 | v37.91,30.12 21.91,30.12 9.14,42.89 TP11.TP 9.14,42.95 v9.14,44.35 | v12.26,47.46 12.83,46.89 12.83,46.38 U2.5
  Bottom 0.15: v81.6,13.1 81.03,12.53 81.03,12.47 80.77,12.22 75.95,12.22 58.04,30.12 v37.91,30.12 | v9.14,44.35 v12.26,47.46
EPD_RST  (via drill 0.3)
  Top 0.15: v80.58,12.66 83.95,12.66 86.3,15.01 86.3,15.58 J1.10 | v17.21,60.86 17.21,63.33 16.7,63.84 U2.21 16.7,63.91 16.7,64.16 18.99,66.44 18.99,67.78 TP12.TP
  Bottom 0.15: v80.58,12.66 75.95,12.66 58.17,30.44 47.62,30.44 v17.21,60.86
FLASH_CS  (via drill 0.3)
  Top 0.15: v31.3,49.36 31.37,49.36 32,48.73 R5.1 | D9.2 33.59,50.19 33.21,50.57 v32.77,50.57 25.72,50.57 21.78,46.63 U2.12 | v32.77,54.89 32.77,55.9 33.47,56.6 33.47,56.92 U1.1
  Bottom 0.15: v31.3,49.36 31.56,49.36 v32.77,50.57 v32.77,54.89
GDR  (via drill 0.3)
  Top 0.15: v90.3,14.82 90.3,15.58 J1.2 | R4.2 72.07,16.09 71.69,15.71 v71.37,15.71 71.37,16.28 70.48,17.17 69.79,17.17 69.09,16.47 68.83,16.47 Q3.1
  Bottom 0.15: v90.3,14.82 90.04,14.82 89.98,14.88 89.6,14.88 86.3,11.58 75.5,11.58 v71.37,15.71
GND  (via drill 0.3)
  Top 0.15: 52.7,100.54 52.7,99.59 51.94,98.83 50.04,98.83 49.53,99.34 47.75,99.34 IC1.3 | 52.7,100.54 52.01,101.24 C_DELAY.2 | C5.2 67.44,107.02 66.67,107.02 65.85,106.2 RESET_BUTTON.2 65.79,106.26 62.36,106.26 RESET_BUTTON.1 | 52.7,100.54 56.64,100.54 62.29,106.2 RESET_BUTTON.1 | RESET_BUTTON.1 62.23,106.2 61.4,107.02 61.4,107.34 61.09,107.66 51.94,107.66 51.82,107.53 51.82,107.21 50.86,106.26 CHANGE_BUTTON.2 50.8,106.26 47.37,106.26 CHANGE_BUTTON.1 47.31,106.2 46.48,107.02 45.72,107.02 C10.2 45.66,107.09 45.59,107.15 27.56,107.15 C6.2 27.43,107.09 26.67,107.09 25.84,106.26 BOOT_BUTTON.2 25.72,106.26 22.35,106.26 BOOT_BUTTON.1 22.23,106.26 21.27,107.21 21.27,107.59 21.14,107.72 12.38,107.72 2.29,97.62 2.29,95.53 2.16,95.4 J4.G4 2.16,95.34 2.16,95.02 4.64,92.54 4.76,92.54 J4.P6 4.64,92.48 1.21,89.05 1.21,86.32 | 1.21,86.32 1.21,82.26 J4.G3 1.21,82.19 1.21,70.44 7.75,63.91 U2.28 7.81,63.84 7.81,59.46 9.62,57.65 | C9.1 6.6,99.53 7.3,99.53 7.87,100.1 8.89,100.1 10.35,98.64 10.35,98.32 D8.1 10.41,98.64 10.99,98.64 11.37,99.02 12.51,99.02 14.54,96.99 14.54,91.84 15.37,91.02 J4.G2 15.43,90.89 16.26,90.07 16.26,87.15 15.43,86.32 | 15.43,86.32 15.43,85.31 J4.G1 | 15.43,86.32 1.21,86.32 | TP5.TP 2.73,40.16 2.73,43.14 TP4.TP 2.73,43.2 3.75,43.2 6.86,46.31 7.75,46.31 U2.1 7.81,55.84 9.62,57.65 | 33.53,52.67 33.53,51.52 34.35,50.7 34.35,49.36 33.66,48.67 D9.1 33.66,48.6 33.66,43.97 43.56,34.06 D10.1 43.56,34 46.99,34 D12.1 47.05,34 48.77,34 D11.1 48.83,33.93 v53.02,33.93 | 33.53,52.67 33.53,53.11 U1.4 33.47,53.11 14.8,53.11 | 14.8,53.11 14.8,53.55 U2.29_8
  Top 0.15: 14.8,53.11 14.8,52.41 U2.29_7 14.73,52.41 13.59,52.41 U2.29_4 | U2.29_4 13.53,52.41 13.53,53.55 U2.29_5 | U2.29_4 13.46,52.41 12.32,52.41 U2.29_1 12.26,52.41 12.26,53.55 U2.29_2 12.26,53.68 12.26,54.82 U2.29_3 | U2.29_3 12.32,54.89 13.46,54.89 U2.29_6 13.53,54.89 14.73,54.89 U2.29_9 | 9.62,57.65 12.32,54.95 U2.29_3 | v35.05,53.43 36.64,55.02 37.34,55.02 U1.9 | 33.53,52.67 v34.29,52.67 | EPD_C11.1 90.04,21.23 88.14,21.23 EPD_C10.1 88.08,21.23 86.11,21.23 EPD_C9.1 86.04,21.23 84.14,21.23 EPD_C8.1 84.01,21.23 82.11,21.23 EPD_C7.1 82.04,21.3 81.41,21.3 | EPD_C11.1 90.11,21.3 92.08,21.3 EPD_C12.1 92.08,21.36 107.38,36.66 107.38,40.35 | 81.41,21.3 80.14,21.3 EPD_C6.1 | 81.41,21.3 81.41,23.01 81.85,23.45 81.85,25.04 C7.2 81.92,25.11 87.38,30.57 89.47,30.57 D3.1 | v86.93,14.82 87.31,15.2 87.31,15.58 J1.8 | v83.25,14.82 82.87,15.2 82.87,15.58 J1.17 82.87,15.64 82.87,16.72 78.42,21.17 78.11,21.17 EPD_C5.1 77.98,21.23 76.2,21.23 74.87,22.57 74.61,22.57 D6.1 | SJ1.1 67.12,12.85 67.25,12.98 67.25,14.31 R2.1 67.31,14.38 67.44,14.38 68.33,15.26 72.52,15.26 73.34,16.09 R4.1 | EPD_C2.1 72.2,18.38 73.66,18.38 EPD_C1.1 73.41,18.31 73.41,16.22 R4.1 | R4.1 73.41,16.09 76.33,13.17 78.3,13.17 J1.MP2 78.36,13.1 79.88,11.58 86.11,11.58 87.63,13.1 90.74,13.1 | 90.74,13.1 91.82,13.1 J1.MP1 | v90.74,13.17 90.74,13.1 | v90.11,17.36 90.11,21.17 EPD_C11.1 | 88.14,48.92 87.95,48.92 87.31,48.28 86.42,48.28 85.6,49.11 85.6,52.03 U3.13 | 88.14,48.92 C8.2 | 120.08,38.63 120.08,37.93 C1_BAT1.2 | 120.08,38.63 119.63,39.08 118.24,39.08 117.16,40.16 117.16,40.28 R1_PWRUSB.1 117.09,40.35 107.38,40.35
  Top 0.15: 107.38,40.35 96.08,51.65 94.17,51.65 C10_SUPERCAP.1 94.11,51.65 v93.15,50.7 | v89.92,50.7 C8.2 | C8.2 88.14,48.92 | C4_USB.2 149.22,45.3 149.22,46.63 C5_USB.2 149.29,46.7 160.97,46.7 164.34,50.06 J2.MP3 164.91,49.55 164.4,50.06 164.4,50.95 | J2.B12 164.4,51.52 164.4,51.27 J2.A1 164.4,51.2 164.4,50.95 | IC4.2 121.6,40.85 122.43,40.85 123.89,42.31 v126.17,42.31 126.56,42.31 127.64,41.23 C3.- 127.7,41.17 127.76,41.11 130.75,41.11 C1_BAT2.2 | 126.36,49.62 126.36,47.71 124.65,46 124.65,45.87 R2_BAT.1 | 126.36,49.62 126.94,50.19 127.19,50.19 MCP73831.2 | v119.63,50.76 118.3,50.76 C2_BAT.2 | v125.92,50 126.3,49.62 126.36,49.62 | 159.38,8.6 159.83,8.6 C2.2 | 159.38,8.6 158.81,8.6 C1.2 | 158.31,11.64 157.86,11.2 157.86,10.95 SENSOR2.7 | 158.94,11.64 158.31,11.64 | 158.94,11.64 159.38,11.2 159.38,10.95 SENSOR2.5 159.38,10.88 159.38,8.6 | SENSOR2.1 157.04,13.8 157.04,12.98 158.31,11.71 158.31,11.64 | v164.4,17.36 165.1,18.06 J3.1 | 158.94,11.64 v158.94,11.9 | 168.91,58.25 168.91,59.65 J2.MP2 | 168.91,58.25 168.91,49.55 J2.MP1 | U4.4 133.35,53.68 133.67,53.68 134.37,54.38 U4.9 | U4.9 134.37,54.44 133.67,55.14 133.35,55.14 U4.1 133.29,55.14 132.91,55.14 130.81,53.05 129.6,53.05 C1_BAT.2 129.54,53.05 v128.91,52.41 | U4.9 134.43,54.38 134.62,54.19 135.25,54.19 U4.6 135.32,54.13 139.38,54.13 141.99,51.52 142.05,51.52 | 164.4,58.25 164.4,59.14 164.91,59.65 J2.MP4 | 164.4,58.25 164.4,58 J2.A12 164.4,57.94 164.4,57.68 J2.B1 164.34,57.62 148.78,57.62 143.7,52.54 143.38,52.54 D1.2 143.32,52.47 143,52.47 142.05,51.52 | R2-USB1.1 149.67,50.19 145.54,50.19 R2-USB.2 145.41,50.12 144.72,49.43 142.24,49.43 142.05,49.62 142.05,51.52
  Top 0.15: v166.75,58.25 168.91,58.25 | 164.4,58.25 v165.35,58.25 | v165.74,50.95 164.4,50.95 | v122.43,38.63 120.08,38.63
  Bottom 0.15: v34.29,52.67 v35.05,53.43 | 90.11,15.26 90.49,15.26 90.74,15.01 v90.74,13.17 | 90.11,15.26 89.53,15.26 89.09,14.82 v86.93,14.82 v83.25,14.82 82.87,14.82 79.38,18.31 75.12,18.31 59.5,33.93 v53.02,33.93 | 90.11,15.26 v90.11,17.36 | v93.15,50.7 v89.92,50.7 | v119.63,50.76 125.16,50.76 v125.92,50 126.05,50 126.27,49.78 | 126.27,49.78 127.25,48.79 127.25,48.41 126.17,47.33 v126.17,42.31 126.11,42.31 v122.43,38.63 | v158.94,11.9 v164.4,17.36 164.4,19.39 166.05,21.04 166.05,50.95 | v165.35,58.25 166.05,58.25 | 166.05,58.25 v166.75,58.25 | 166.05,58.25 166.05,50.95 | v128.91,52.41 126.27,49.78 | 166.05,50.95 v165.74,50.95
  pour Top: 6.37,46.14 6.35,46.12 6.33,46.1 0.08,46.1 0.08,0.08 75.92,0.08 75.92,10.22 75.94,10.24 75.96,10.26 75.98,10.28 94.22,10.28 94.24,10.26 94.26,10.24 94.28,10.22 94.28,0.08 169.92,0.08 169.92,0.18 169.92,0.18 169.92,0.2 169.92,0.22 169.92,0.22 170.03,67.12 91.98,67.12 91.96,67.14 91.94,67.16 91.92,67.18 91.92,111.12 67.88,111.12 67.88,108.48 67.86,108.46 67.84,108.44 67.82,108.42 20.08,108.42 20.06,108.44 20.04,108.46 20.02,108.48 20.02,111.12 0.08,111.12 0.08,64.13 6.33,64.13 6.35,64.11 6.37,64.09 6.39,64.07 6.39,46.16
  pour Bottom: 6.37,46.14 6.35,46.12 6.33,46.1 0.08,46.1 0.08,0.08 75.92,0.08 75.92,10.22 75.94,10.24 75.96,10.26 75.98,10.28 94.22,10.28 94.24,10.26 94.26,10.24 94.28,10.22 94.28,0.08 169.92,0.08 169.92,0.18 169.92,0.18 169.92,0.2 169.92,0.22 169.92,0.22 170.03,67.12 91.98,67.12 91.96,67.14 91.94,67.16 91.92,67.18 91.92,111.12 67.88,111.12 67.88,108.48 67.86,108.46 67.84,108.44 67.82,108.42 20.08,108.42 20.06,108.44 20.04,108.46 20.02,108.48 20.02,111.12 0.08,111.12 0.08,64.13 6.33,64.13 6.35,64.11 6.37,64.09 6.39,64.07 6.39,46.16
  pour Top: 6.37,46.14 6.35,46.12 6.33,46.1 0.08,46.1 0.08,0.08 75.92,0.08 75.92,10.22 75.94,10.24 75.96,10.26 75.98,10.28 94.22,10.28 94.24,10.26 94.26,10.24 94.28,10.22 94.28,0.08 169.92,0.08 169.92,0.18 169.92,0.18 169.92,0.2 169.92,0.22 169.92,0.22 170.03,67.12 91.98,67.12 91.96,67.14 91.94,67.16 91.92,67.18 91.92,111.12 67.88,111.12 67.88,108.48 67.86,108.46 67.84,108.44 67.82,108.42 20.08,108.42 20.06,108.44 20.04,108.46 20.02,108.48 20.02,111.12 0.08,111.12 0.08,64.13 6.33,64.13 6.35,64.11 6.37,64.09 6.39,64.07 6.39,46.16
  pour Bottom: 6.37,46.14 6.35,46.12 6.33,46.1 0.08,46.1 0.08,0.08 75.92,0.08 75.92,10.22 75.94,10.24 75.96,10.26 75.98,10.28 94.22,10.28 94.24,10.26 94.26,10.24 94.28,10.22 94.28,0.08 169.92,0.08 169.92,0.18 169.92,0.18 169.92,0.2 169.92,0.22 169.92,0.22 170.03,67.12 91.98,67.12 91.96,67.14 91.94,67.16 91.92,67.18 91.92,111.12 67.88,111.12 67.88,108.48 67.86,108.46 67.84,108.44 67.82,108.42 20.08,108.42 20.06,108.44 20.04,108.46 20.02,108.48 20.02,111.12 0.08,111.12 0.08,64.13 6.33,64.13 6.35,64.11 6.37,64.09 6.39,64.07 6.39,46.16
GPIO8  (via drill 0.3)
  Top 0.15: v18.22,43.33 18.99,42.57 19.18,42.57 R1.1 | v18.22,45.11 19.18,46.06 19.18,46.31 U2.10
  Bottom 0.15: v18.22,45.11 v18.22,43.33
I2C_PW  (via drill 0.3)
  Top 0.15: C2.1 159.83,7.33 158.81,7.33 C1.1 158.81,7.39 157.67,8.53 R1-PINH.2 157.67,8.6 156.66,8.6 R2-PINH.2 157.04,8.66 157.04,10.18 | 157.04,10.18 157.04,10.88 SENSOR2.8 156.97,10.95 156.53,11.39 156.53,14.38 | 156.53,14.38 156.72,14.56 157.35,14.56 157.8,14.12 157.8,13.87 SENSOR2.2 | 157.04,10.18 158.12,10.18 158.56,10.63 158.56,10.88 SENSOR2.6 | v35.69,58.25 27.11,58.25 21.78,63.59 21.78,63.84 U2.17 | v156.4,14.44 156.46,14.38 156.53,14.38
  Bottom 0.15: v35.69,58.25 81.72,58.25 125.54,14.44 v156.4,14.44
INT_RTC  (via drill 0.3)
  Top 0.15: v92.96,61.3 92.65,61.62 92.14,61.62 R1_PINH1.1 | v94.93,63.97 94.93,65.05 94.68,65.3 TP15.TP | v29.46,52.67 22.73,52.67 16.7,46.63 16.7,46.38 U2.8 | v86.81,59.97 86.81,61.3 U3.3
  Bottom 0.15: v94.93,63.97 92.96,62 v92.96,61.3 92.9,61.3 91.76,60.16 86.81,60.16 | v29.46,52.67 36.96,60.16 86.81,60.16 | 86.81,60.16 v86.81,59.97
IO/BOOT  (via drill 0.3)
  Top 0.15: 24.26,107.78 25.78,107.78 BOOT_BUTTON.3 | 24.26,107.78 22.35,107.78 BOOT_BUTTON.4 | 24.26,105.5 27.11,105.5 27.43,105.81 C6.1 | 24.26,105.5 21.46,105.5 21.14,105.81 20.64,105.81 R_BOOT.1 | v24.26,100.16 24.26,63.91 U2.15 | v24.26,105.43 24.26,105.5 | v24.26,106.7 24.26,107.78
  Bottom 0.15: v24.26,100.16 v24.26,105.43 v24.26,106.7
IO/CHANGE  (via drill 0.3)
  Top 0.15: CHANGE_BUTTON.3 50.8,107.78 47.37,107.78 CHANGE_BUTTON.4 47.24,107.72 46.29,107.72 v46.23,107.78 | R_CHANGE.1 52.45,105.75 52.2,105.5 46.48,105.5 46.23,105.75 45.72,105.75 C10.1 45.72,105.69 v45.09,105.05 | v14.16,66.64 14.16,63.91 U2.23
  Bottom 0.15: v14.16,66.64 14.16,74.13 v45.09,105.05 45.09,105.12 46.23,106.26 v46.23,107.78
MISO  (via drill 0.3)
  Top 0.15: v47.75,31.58 46.99,30.82 R8.1 | v47.75,34.7 D12.2 | v34.23,56.09 33.85,55.71 33.53,55.71 U1.2 | v3.49,94.83 4.64,93.69 4.95,93.69 J4.P7 | v1.84,96.48 1.84,100.61 TP6.TP | v9.02,85.88 9.02,63.91 U2.27 9.08,63.84 9.08,63.59 19.24,53.43 20.26,53.43 20.38,53.55 v25.15,53.55
  Bottom 0.15: v47.75,31.58 v47.75,34.7 47.75,41.36 34.23,54.89 34.23,55.33 | 34.23,55.33 v34.23,56.09 | v1.84,96.48 v3.49,94.83 3.49,94.77 9.02,89.24 v9.02,85.88 | 34.23,55.33 32.58,55.33 29.91,52.67 29.91,52.47 29.21,51.78 26.92,51.78 v25.15,53.55
MOSI  (via drill 0.3)
  Top 0.15: v14.8,47.46 15.37,46.89 15.37,46.38 U2.7 | v14.8,44.28 14.8,43.78 14.1,43.08 TP7.TP | v4.25,88.48 4.95,89.18 J4.P3 | v41.34,47.14 41.34,53.11 U1.5 | v41.34,42.89 48.77,35.46 D11.2 48.83,35.39 v49.53,34.7 | J1.14 84.33,15.58 84.33,15.2 83.5,14.38 79.69,14.38 74.36,19.71 74.36,20.34 70.87,23.84 55.63,23.84 48.7,30.76 R7.1 48.77,30.76 v49.53,31.52 | v32.26,46.44 v30.99,46.44
  Bottom 0.15: 14.8,46.44 v14.8,44.28 14.73,44.35 13.34,44.35 13.08,44.6 13.08,47.27 9.02,51.33 9.02,61.75 4.25,66.51 v4.25,88.48 | 14.8,46.44 v14.8,47.46 | v41.34,42.89 41.34,46.44 | 41.34,46.44 v41.34,47.14 | v49.53,31.52 v49.53,34.7 | v30.99,46.44 14.8,46.44 | 41.34,46.44 v32.26,46.44
N$1
  Top 0.15: IC1.5 50.61,101.24 51.94,99.91 C_DELAY.1
N$2
  Top 0.15: R2-USB1.2 150.94,52.73 151.26,52.73 151.76,53.24 164.27,53.24 164.34,53.3 J2.A5
N$3  (via drill 0.3)
  Top 0.15: v122.81,49.55 121.79,49.55 R1_BAT.2 | v126.81,48.6 126.81,48.86 127.19,49.24 MCP73831.1
  Bottom 0.15: v122.81,49.55 125.86,49.55 v126.81,48.6
N$4  (via drill 0.3)
  Top 0.15: v119.44,38.63 119.44,38.57 118.81,37.93 C1_BAT1.1 | v119.44,39.52 119,39.52 118.68,39.84 D2.1 | 120.9,40.41 121.41,39.9 121.54,39.9 IC4.3 | 120.9,40.41 120.9,41.17 121.54,41.81 IC4.1 121.6,41.81 122.56,42.76 128.27,42.76 131.83,46.31 132.59,46.31 Q1.2 | 120.9,40.41 v120.4,40.41
  Bottom 0.15: v119.44,38.63 v119.44,39.52 119.51,39.52 v120.4,40.41
N$5
  Top 0.15: CHG_LED.C 120.4,50.89 120.4,49.68 120.46,49.62 R1_BAT.1
N$6
  Top 0.15: R2_BAT.2 124.65,47.14 124.65,49.24 MCP73831.5
N$8  (via drill 0.3)
  Top 0.15: v77.22,18.76 77.22,18.12 79.31,16.03 79.31,15.64 J1.24 | v91.38,23.27 EPD_C12.2
  Bottom 0.15: v77.22,18.76 77.22,20.85 80.58,24.22 90.42,24.22 v91.38,23.27
N$9
  Top 0.15: C4.1 94.61,30.63 93.03,30.63 D3.2 92.96,30.63 88.96,34.63 84.45,34.63 82.42,36.66 80.26,36.66 D4.1
N$10  (via drill 0.3)
  Top 0.15: v86.74,63.14 87,63.4 87.44,63.4 R_CAPACITOR.1 | v86.36,64.29 87.06,64.98 D7.1
  Bottom 0.15: v86.74,63.14 86.74,63.91 v86.36,64.29
N$11  (via drill 0.3)
  Top 0.15: v146.37,48.92 145.54,48.92 R2-USB.1 | v153.8,56.35 164.34,56.35 J2.B5
  Bottom 0.15: v153.8,56.35 v146.37,48.92
N$12  (via drill 0.3)
  Top 0.15: v82.42,16.53 82.36,16.47 82.36,15.64 J1.18 | v80.9,23.01 80.58,23.01 80.14,22.57 EPD_C6.2
  Bottom 0.15: v82.42,16.53 82.42,19.07 85.66,22.31 85.66,22.69 85.34,23.01 v80.9,23.01
N$13  (via drill 0.3)
  Top 0.15: v81.34,14.82 81.34,15.58 J1.20 | v79.57,16.85 79.57,18.63 v79.69,18.76 | v82.87,22.57 84.07,22.57 EPD_C8.2
  Bottom 0.15: v81.34,14.82 81.34,15.07 v79.57,16.85 | v79.69,18.76 79.69,18.88 80.14,19.33 80.14,19.84 v82.87,22.57
N$14  (via drill 0.3)
  Top 0.15: v81.79,16.53 81.79,15.64 J1.19 | v82.8,21.87 82.11,22.57 EPD_C7.2
  Bottom 0.15: v81.79,16.53 80.45,17.87 80.45,19.52 v82.8,21.87
N$17  (via drill 0.3)
  Top 0.15: v79.57,19.39 79.69,19.39 80.33,18.76 80.33,15.64 J1.22 | v87.44,23.2 88.08,22.57 EPD_C10.2
  Bottom 0.15: v79.57,19.39 79.57,22.31 80.71,23.45 87.19,23.45 v87.44,23.2
N$26  (via drill 0.3)
  Top 0.15: v80.14,13.36 80.14,12.47 80.39,12.22 85.79,12.22 88.84,15.26 88.84,15.58 J1.5 | v72.9,18.95 72.2,19.64 EPD_C2.2
  Bottom 0.15: v80.14,13.36 80.14,13.55 75.69,17.99 73.85,17.99 v72.9,18.95
N$27
  Top 0.15: J1.4 89.34,15.58 89.34,15.26 85.98,11.9 80.26,11.9 78.8,13.36 78.8,14.5 73.72,19.58 EPD_C1.2
PREVGH  (via drill 0.3)
  Top 0.15: v80.9,18.06 80.9,15.64 J1.21 | v85.22,22.5 86.04,22.5 EPD_C9.2 86.11,22.57 89.41,25.87 89.41,27.07 D5.1
  Bottom 0.15: v80.9,18.06 80.9,18.18 v85.22,22.5
PREVGL  (via drill 0.3)
  Top 0.15: v79.12,19.01 79.18,18.95 79.18,17.68 79.12,17.61 79.12,16.66 79.38,16.41 79.44,16.41 79.82,16.03 79.82,15.64 J1.23 | v88.84,23.77 90.04,22.57 EPD_C11.2 89.92,22.76 95.63,28.47 95.63,32.09 91.06,36.66 83.76,36.66 D4.2
  Bottom 0.15: v79.12,19.01 79.12,22.31 80.58,23.77 v88.84,23.77
RESE  (via drill 0.3)
  Top 0.15: v89.79,14.44 89.79,15.58 J1.3 | v86.61,11.26 73.28,11.26 71.72,12.82 | 71.72,12.82 70.55,13.99 R3.2 | 71.72,12.82 70.67,11.77 66.42,11.77 66.29,11.9 66.29,14.5 67.37,15.58 69.09,15.58 69.91,16.41 70.1,16.41 Q3.2
  Bottom 0.15: v86.61,11.26 v89.79,14.44
RESE'
  Top 0.15: R3.1 70.48,12.72 68.71,12.72 68.64,12.79 SJ1.2 68.58,12.85 68.58,14.31 R2.2
RESET  (via drill 0.3)
  Top 0.15: C5.1 67.5,105.81 67.5,105.94 68.14,106.58 68.14,107.53 67.94,107.72 65.85,107.72 RESET_BUTTON.3 65.79,107.78 63.44,107.78 | 63.44,107.78 62.36,107.78 RESET_BUTTON.4 | v51.5,105.05 47.75,101.31 IC1.1 | v59.94,105.05 60.58,105.69 R_RESET.1 | v10.35,55.33 10.35,46.38 U2.3 | v63.44,107.72 63.44,107.78
  Bottom 0.15: v10.35,55.33 10.35,62.19 51.5,103.34 v51.5,105.05 v59.94,105.05 60.01,105.05 62.67,107.72 v63.44,107.72
RTC_RST  (via drill 0.3)
  Top 0.15: v35.69,62.89 23.75,62.89 23.05,63.59 23.05,63.84 U2.16 | v84.33,62.89 85.53,61.68 85.53,61.36 U3.4
  Bottom 0.15: v84.33,62.89 v35.69,62.89
RX
  Top 0.15: U2.24 12.89,63.91 12.89,66.7 14.16,67.97 TP2.TP
SCK  (via drill 0.3)
  Top 0.15: v13.53,47.46 14.1,46.89 14.1,46.38 U2.6 | v13.53,44.79 11.81,43.08 TP8.TP 12.06,43.27 13.53,41.81 21.91,41.81 27.43,47.33 27.81,47.33 43.05,32.09 43.05,31.46 43.69,30.82 R6.1 43.75,30.76 45.88,28.63 | v3.87,91.02 4.25,91.4 4.95,91.4 J4.P5 | v42.74,45.74 42.74,52.67 41.34,54.06 41.34,54.38 U1.6 | v42.74,36.22 43.5,35.46 D10.2 | v79.25,13.8 83.38,13.8 84.84,15.26 84.84,15.58 J1.13 | v65.85,23.39 51.12,23.39 45.88,28.63 | v47.82,30.88 47.82,30.57 45.88,28.63
  Bottom 0.15: v13.53,44.79 v13.53,47.46 13.53,47.52 9.91,51.14 9.91,84.23 3.87,90.26 v3.87,91.02 | v42.74,45.74 v42.74,36.22 42.74,35.97 v47.82,30.88 | v79.25,13.8 75.44,13.8 v65.85,23.39
SCL  (via drill 0.3)
  Top 0.15: 159.29,14.79 159.38,14.69 159.38,13.87 SENSOR2.4 | 159.29,14.79 158.88,15.2 156.53,15.2 155.96,14.63 155.96,8.15 156.59,7.52 156.59,7.33 R2-PINH.1 | v136.08,54.63 135.32,54.63 U4.7 | v165.1,25.61 165.1,21.11 J3.4 | v159.38,14.82 159.32,14.82 159.29,14.79 | v18.8,64.98 17.97,64.16 17.97,63.91 U2.20 | v90.04,52.73 89.41,52.09 U3.16
  Bottom 0.15: v159.38,14.82 165.1,20.54 v165.1,25.61 v136.08,54.63 135.57,54.63 129.86,60.35 95.38,60.35 | v18.8,64.98 94.55,64.98 95.38,64.16 95.38,60.35 | 95.38,60.35 90.04,55.02 v90.04,52.73
SDA  (via drill 0.3)
  Top 0.15: R1-PINH.1 157.73,7.26 158.12,6.88 158.12,6.82 158.24,6.69 160.4,6.69 160.53,6.82 160.53,11.71 158.62,13.61 158.62,13.8 SENSOR2.3 158.69,13.87 v158.69,14.76 | v164.02,20.09 165.1,20.09 J3.3 | v134.11,55.46 134.68,55.46 134.94,55.2 135.25,55.2 U4.8 | v92.96,54.32 90.04,54.32 88.14,52.41 88.14,52.09 U3.15 | v21.59,61.24 19.24,63.59 19.24,63.84 U2.19 | v94.11,57.24 v90.11,61.24
  Bottom 0.15: v158.69,14.76 v164.02,20.09 164.02,25.49 134.11,55.4 v134.11,55.46 94.11,55.46 | v92.96,54.32 94.11,55.46 | v90.11,61.24 v21.59,61.24 | 94.11,55.46 v94.11,57.24
SRC  (via drill 0.3)
  Top 0.15: 93.63,27.8 92.96,27.14 D5.2 | 93.63,27.8 95.31,29.49 95.31,31.07 94.68,31.71 94.68,31.9 C4.2 | v72.52,21.55 69.53,18.57 Q3.3 | v81.12,28.5 v81.12,28.51 L1.1 82.04,29.36 83.95,31.27 90.17,31.27 93.63,27.8
  Bottom 0.15: v81.12,28.5 74.17,21.55 v72.52,21.55
SS_SD  (via drill 0.3)
  Top 0.15: 9.84,97.62 8.38,99.08 8.38,99.47 R10.1 | 9.84,97.62 11.24,97.62 11.87,98.26 D8.2 | 9.84,97.62 9.84,92.61 5.4,88.16 J4.P2 5.4,88.1 v6.1,87.4 | v9.46,56.86 11.56,54.76 11.56,46.38 U2.4
  Bottom 0.15: v9.46,56.86 9.46,84.03 v6.1,87.4
TX
  Top 0.15: U2.25 11.56,63.91 11.56,68.16 TP1.TP
USB_D+  (via drill 0.3)
  Top 0.15: v24.26,48.47 24.26,46.38 U2.14 | v93.09,62.76 94.87,62.76 101.73,55.9 141.22,55.9 143.32,53.81 D1.1
  Bottom 0.15: v24.26,48.47 24.26,49.05 16.76,56.54 16.76,61.05 18.16,62.44 92.77,62.44 v93.09,62.76
USB_D-  (via drill 0.3)
  Top 0.15: v23.3,47.52 23.05,47.27 U2.13 | v144.53,51.9 144.02,51.9 143.38,51.27 D1.3
  Bottom 0.15: v23.3,47.52 23.3,49.55 16.45,56.41 16.45,63.27 18.61,65.43 131,65.43 v144.53,51.9
VBAT
  Top 0.3: U4.2 133.29,54.63 133.29,54.19 U4.3 133.16,54.13 132.84,54.13 132.65,53.94 132.65,51.08 | 132.65,48.41 134.75,48.41 134.81,48.35 TP3.TP | 132.65,48.41 131.7,48.41 Q1.3 | 132.65,48.41 132.65,51.08 | C2_BAT.1 116.97,50.76 118.94,48.79 122.81,48.79 124.59,50.57 126.24,50.57 126.81,51.14 127.19,51.14 MCP73831.3 127.32,51.08 132.65,51.08
VBUS
  Top 0.3: C5_USB.1 147.96,46.63 147.96,45.3 C4_USB.1 147.96,45.11 147.96,43.97 148.56,43.36 | 148.56,43.36 149.29,42.63 PFMF.050.1.2 149.48,42.57 151.07,40.98 152.46,40.98 TP14.TP | C1_BAT.1 129.54,51.78 125.22,51.78 124.71,51.27 MCP73831.4 124.59,51.2 124.33,50.95 121.92,50.95 CHG_LED.A 121.79,51.02 121.54,51.02 120.9,51.65 116.59,51.65 116.27,51.33 116.27,42.63 117.09,41.81 R1_PWRUSB.2 117.16,41.68 118.36,41.68 118.62,41.93 D2.2 118.75,42.06 120.71,42.06 123.83,45.17 129.54,45.17 130.62,46.25 Q1.1 130.75,46.38 131.38,46.38 132.14,47.14 134.37,47.14 134.49,47.01 141.22,47.01 | 141.22,47.01 142.88,48.67 143.32,48.67 D1.5 | 148.56,43.36 145.67,40.47 144.02,40.47 141.29,43.2 141.29,46.89 141.22,47.01
VRTC
  Top 0.3: C8.1 86.87,48.98 86.87,52.03 U3.14 86.93,52.16 86.93,52.67 91.15,56.89 | 91.15,56.89 94.11,53.94 C10_SUPERCAP.2 | 91.15,56.89 88.77,59.27 88.77,63.4 R_CAPACITOR.2
VUSB
  Top 0.3: J2.A9 164.4,57.11 164.4,56.86 J2.B4 164.53,56.79 165.1,56.79 165.23,56.67 165.23,52.54 165.1,52.41 164.53,52.41 J2.B9 164.4,52.35 164.4,52.09 J2.A4 164.27,52.03 157.67,52.03 153.67,48.03 148.15,48.03 144.84,44.73 144.84,42.63 PFMF.050.1.1
(copper drawn outside any net)
  shapes: Top area x1

## Text on the board
tNames: MISO | TX | RX | EPD_RST | EPD_3V3_C | INT_RTC | VBAT | GND | 3V3 | EPD_DC | SCK | VBUS | MOSI | GND | EPD_CS | EPD_3V3 | EPD_BUSY